# Altium PCB IRF7317+TC4427.PcbDoc
Units mil, origin at the board's own origin, x right, y up, seen from the top; angles counter-clockwise.
Board outline 2700 x 1560 mil, 2 copper layers (Top Layer, Bottom Layer); 37 components, 20 nets, 108 pads, 27 vias.
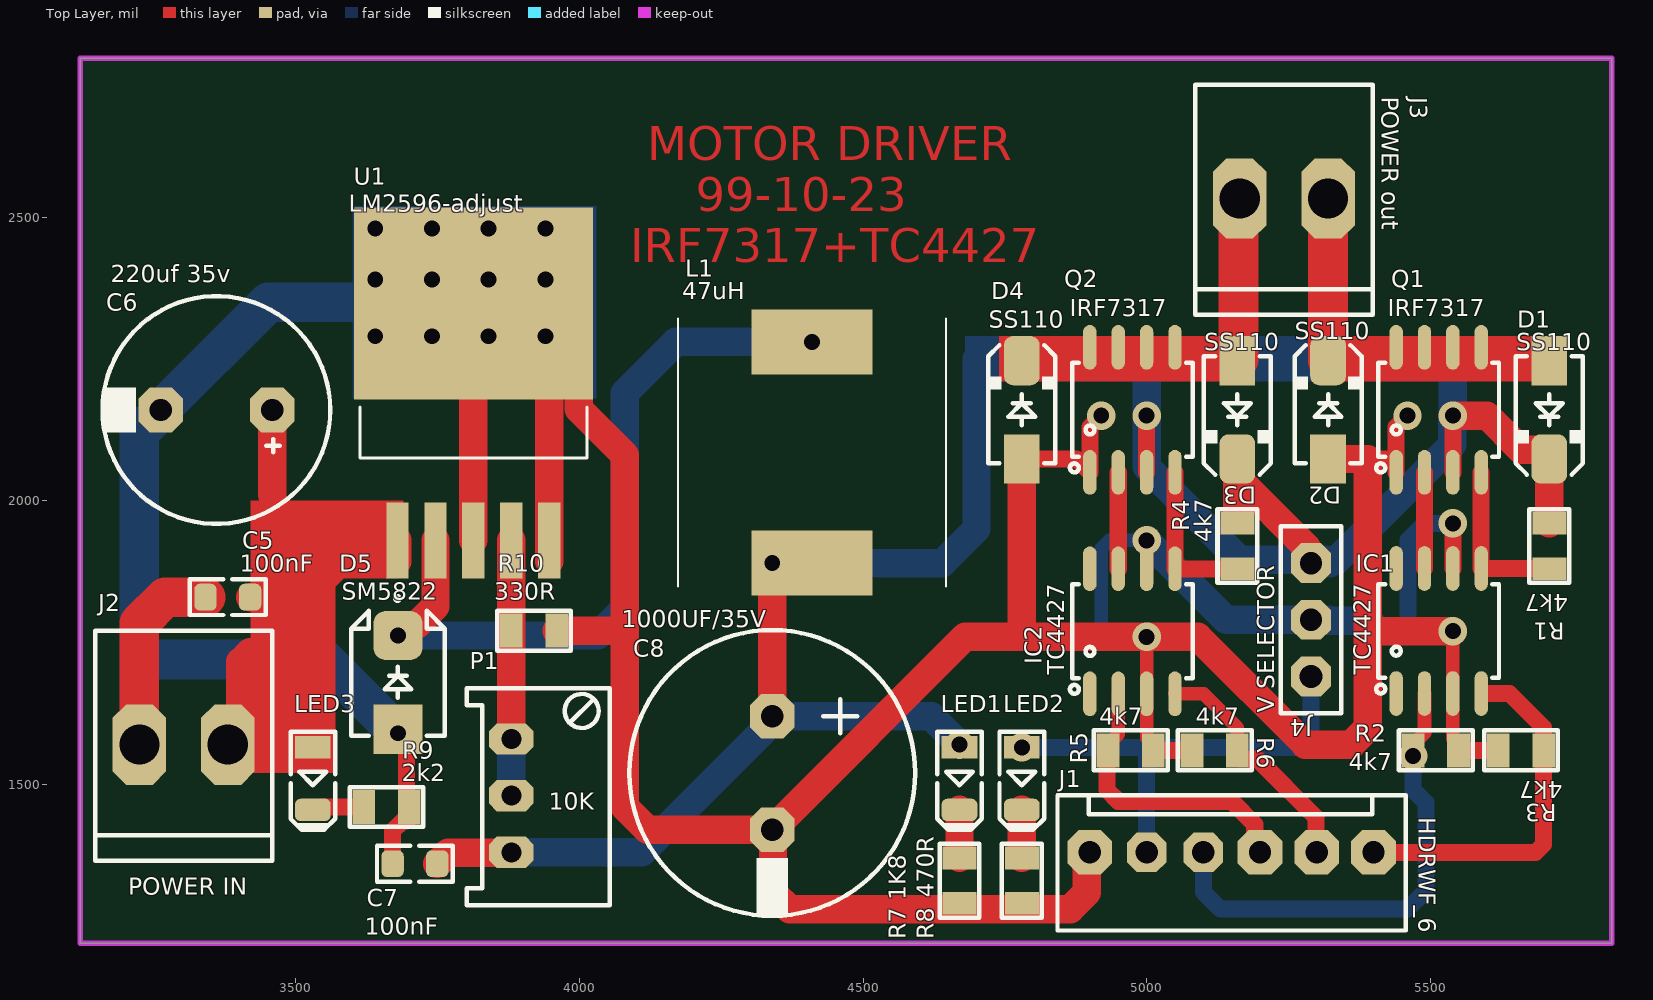
[diagram p0: Top Layer view]
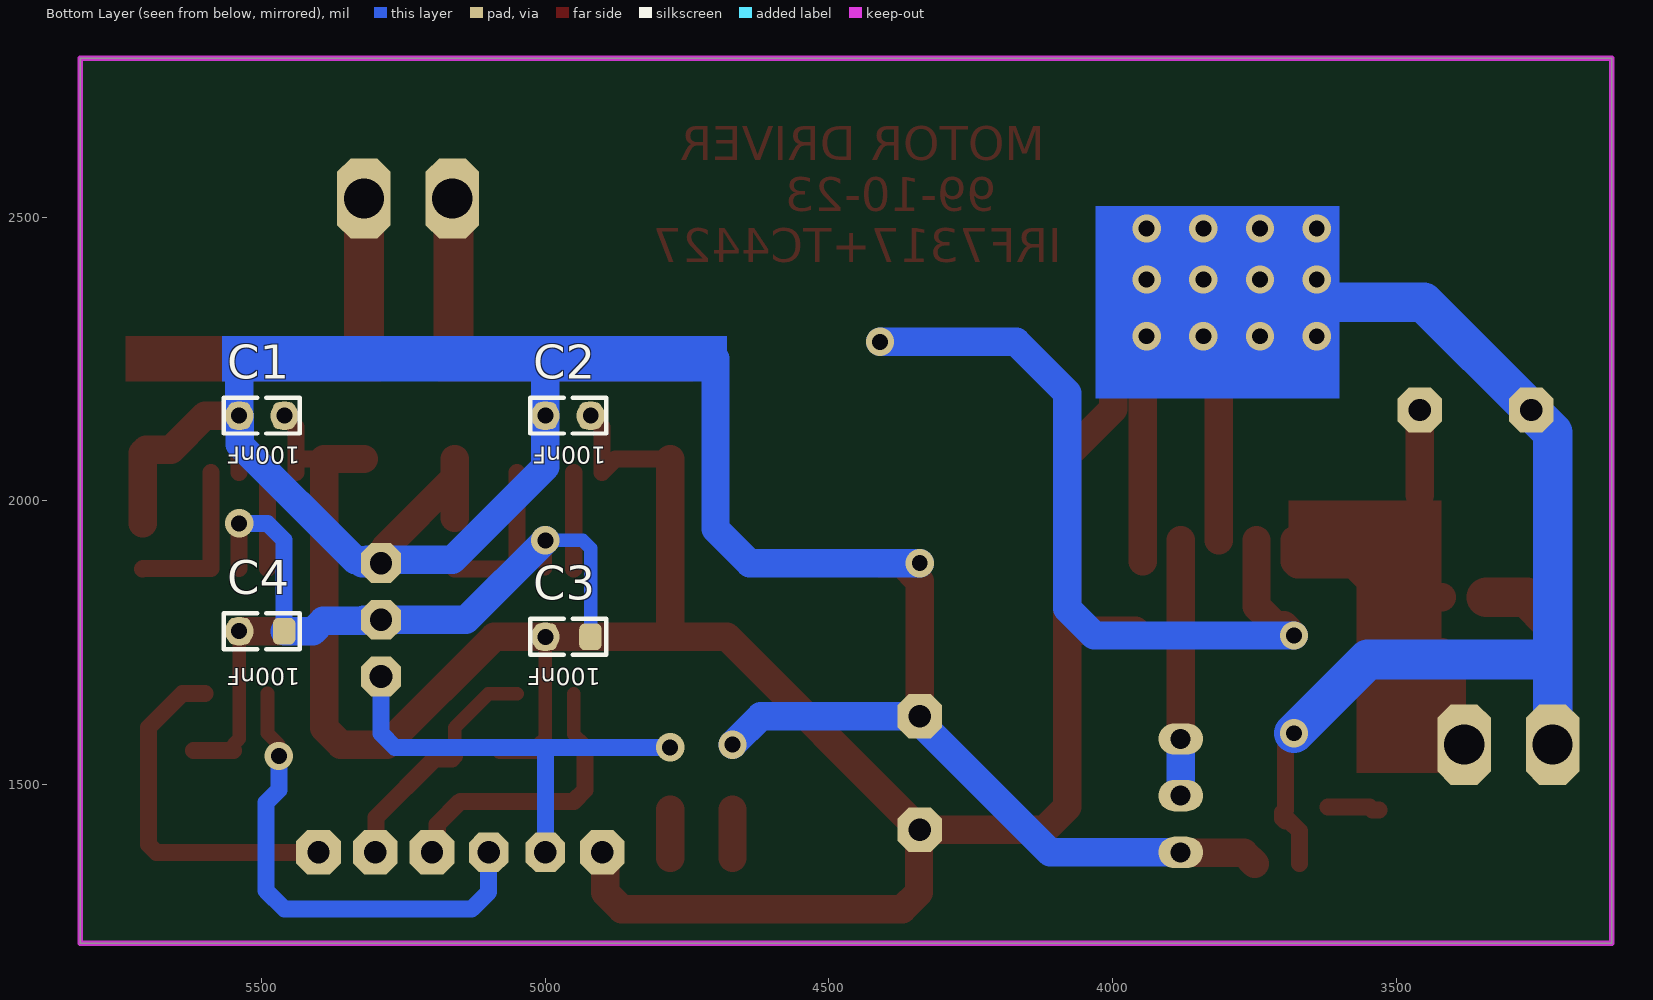
[diagram p1: Bottom Layer view, seen from below]
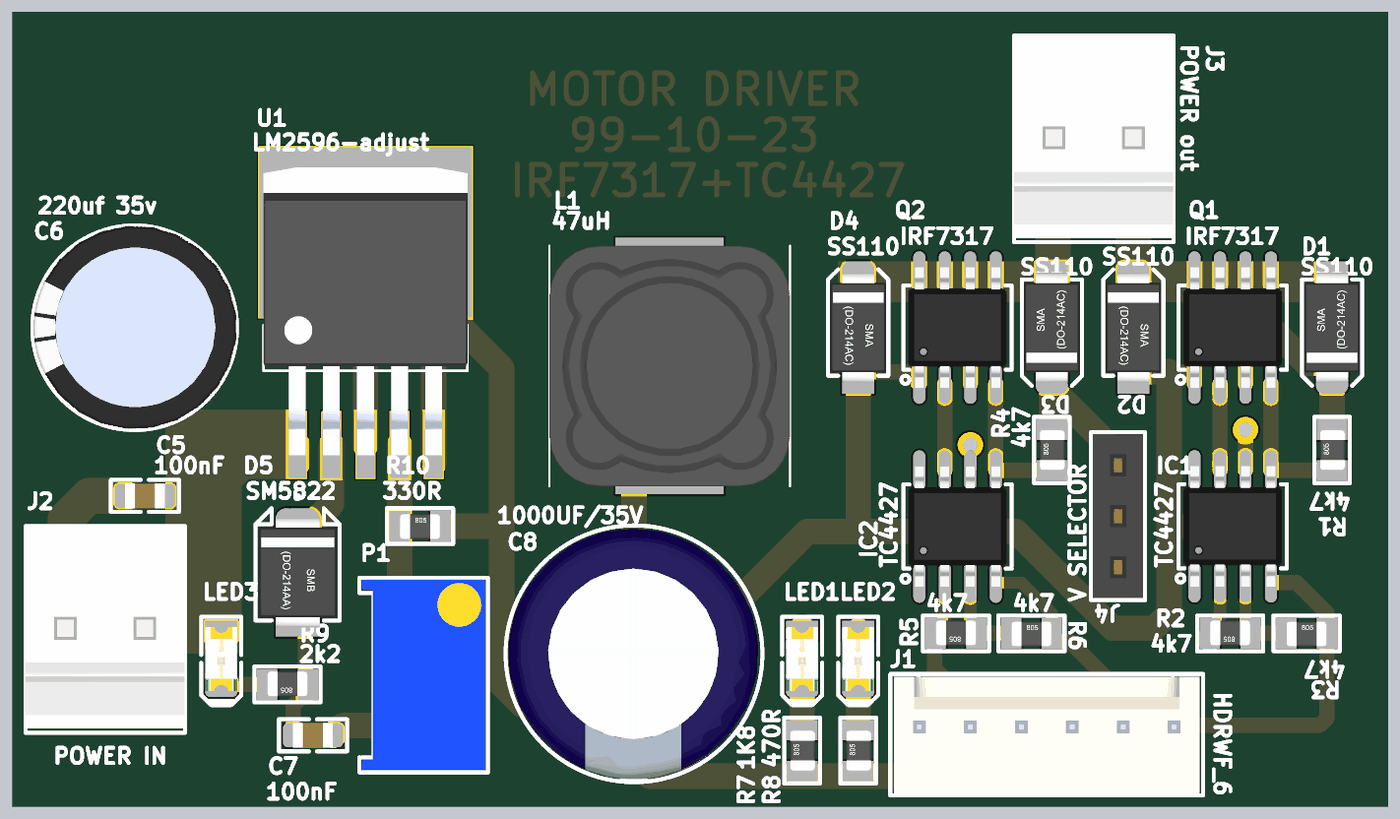
[diagram p2: 3D render of the assembled board from above, using the file's embedded part models]
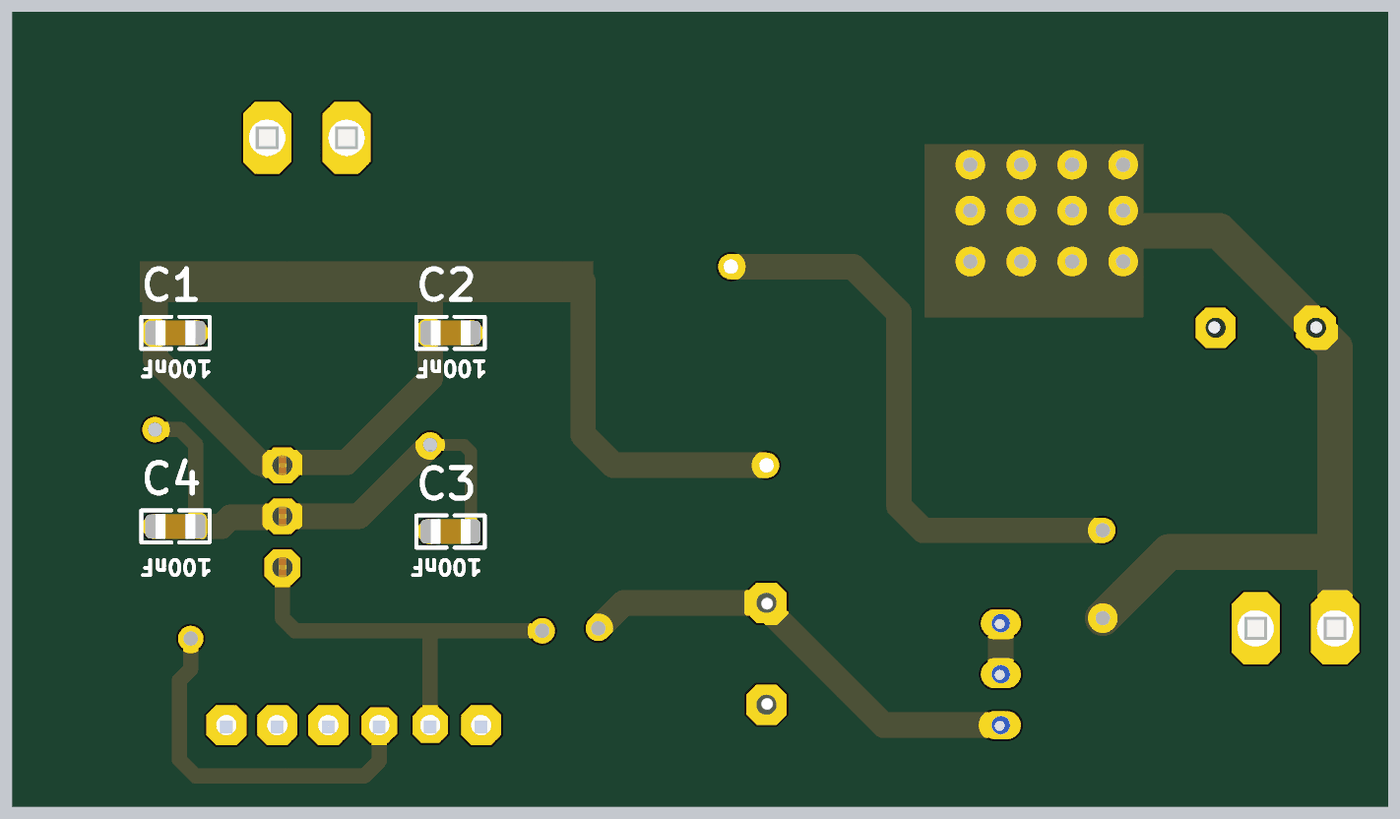
[diagram p3: 3D render of the assembled board from below, using the file's embedded part models]

## Layer stack, top to bottom
Top Solder: solder mask 0.4, Solder Resist, Dk 3.5
Top Layer: signal copper 1.4
Dielectric 1: dielectric 12.6, FR-4, Dk 4.8
Bottom Layer: signal copper 1.4
Bottom Solder: solder mask 0.4, Solder Resist, Dk 3.5

## Board outline
3120,1220 3120,2780 5820,2780 5820,1220

## Design rules (kind name [scope] priority, off if disabled: settings)
Clearance [All] p1: gap=10 ignorepadtopadclearanceinfootprint=FALSE except(0: Arc-Hole Track-Hole SMDPad-Hole THPad-Hole Via-Hole Fill-Hole Poly-Hole Region-Hole Text-Hole)
PolygonConnect [All] p1: connectstyle=Relief reliefconductorwidth=10 reliefentries=4 polygonreliefangle="90 Angle" airgapwidth=10
RoutingVias [All] p1: holewidth=28 width=50 viastyle="Through Hole" minholewidth=28 minwidth=50 maxholewidth=28 maxwidth=50
SolderMaskExpansion [All] p1: expansion=4 istentingtop=FALSE
Width [All] p1: maxlimit=70 minlimit=20 preferedwidth=30 minimp=50.000000 maximp=50.000000 favimp=50.000000
30 further rules are at their usual default settings.

## Components (designator, comment, footprint, x,y, rotation, side; value= is the part's Value field where it differs from the comment)
C1 "100nF" C0805 5500,2150 r0 bottom
C2 "100nF" C0805 4960,2150 r0 bottom
C3 "100nF" C0805 4960,1760 r180 bottom
C4 "100nF" C0805 5500,1770 r180 bottom
C5 "100nF" C0805 3380,1830 r0 top
C6 "220uf 35v" C_EL_10X12 3360,2160 r180 top
C7 "100nF" C0805 3710,1360 r0 top
C8 "1000UF/35V" C_EL_12X25 4340,1520 r270 top
D1 "SS110" D_SMA 5710,2160.24 r270 top value=?
D2 "SS110" D_SMA 5320,2160.24 r90 top value=?
D3 "SS110" D_SMA 5160,2160.24 r270 top value=?
D4 "SS110" D_SMA 4780,2160.24 r90 top value=?
D5 "SM5822" D_SMB 3680,1679.77 r90 top value=?
IC1 "TC4427" SO_8 5515,1770.24 r90 top
IC2 "TC4427" SO_8 4975,1769.76 r90 top
J1 "HDRWF_6" WF_6 5150,1380 r180 top
J2 "POWER IN" PWL_2 3302.05,1570 r180 top
J3 "POWER out" PWL_2 5242.05,2532.79 r180 top
J4 "V SELECTOR" 3_SIP 5290,1790 r90 top
L1 "47uH" CDRH127LDNP560MC-12*12 4410,2279.76 r180 top
LED1 "" LED1206RED 4670,1510 r270 top
LED2 "" LED1206RED 4780,1510 r270 top
LED3 "" LED1206RED 3530,1510 r270 top
P1 "10K" POT_3296W 3880,1480 r270 top
Q1 "IRF7317" SO_8 5515,2160.24 r90 top
Q2 "IRF7317" SO_8 4975,2160.24 r90 top
R1 "4k7" R0805 5710,1920 r0 top
R2 "4k7" R0805 5510,1560 r90 top
R3 "4k7" R0805 5660,1560 r270 top
R4 "4k7" R0805 5160,1920 r0 top
R5 "4k7" R0805 4971.99,1560 r90 top
R6 "4k7" R0805 5120,1560 r270 top
R7 "1K8" R0805 4670,1330 r0 top
R8 "470R" R0805 4780,1330 r0 top
R9 "2k2" R0805 3660,1460 r90 top
R10 "330R" R0805 3920,1770.75 r270 top
U1 "LM2596-adjust" "to-263-5 5d2pak LM2596S" 3813.07,2347.32 r90 top

## Footprints (in the part's own frame and the unit in brackets; to place one, negate y for a bottom-side part, rotate by r counter-clockwise, add the part's x,y. Pads: shape width x height; smd on the part's side, far side on the other; paste and mask are expansions set on the pad)
3_SIP [mil] "Socket Header, Pitch 2.54 mm, THT, Vertical, single row, 3p"
  oct 70x70 hole 40.16: 1(-100,0)
  oct 70x70 hole 39.37: 2(0,0) 3(100,0)
  silkscreen extent -165,-53 165,53, body extent -160,-49 160,49, height 337
C0805 [mm] "CHIP Capacitor, 2.0X1.3mm, 0805"
  rrect50% 1x1.2 smd mask+0.075: 1(-1,0) 2(1,0)
  Top Layer pour cut-out: -0.5,0.8 0.5,0.8 0.5,-0.8 -0.5,-0.8
  silkscreen extent -1.7,-0.8 1.7,0.8, body extent -1,-0.63 1,0.62, height 1
C_EL_10X12 [mm] "Cap Elec, D10.0X12.0H pitch: 5.0mm"
  oct 2x2 hole 1: 1(-2.5,0) 2(2.5,0)
  silkscreen extent -5.1,-5.1 5.1,5.1, body extent -5.07,-5.08 5.05,5.04, height 13.7
C_EL_12X25 [mm] "Cap Elec, D12.0X25.0H pitch: 5.0mm, RB.2/.5"
  oct 2x2 hole 1: 1(-2.54,0) 2(2.54,0)
  silkscreen extent -6.4,-6.4 6.4,6.4, body extent -6.25,-6.27 6.25,6.21, height 25.8
CDRH127LDNP560MC-12*12 [mm]
  rect 5.4x2.9 smd: 1(0,0) 2(0,9.9)
  silkscreen extent -6,-1.05 6,10.95, body extent -6,-1.05 6,10.95, height 7.8
D_SMA [mm] "SMA Molded Diode, 2-Leads, Body 4.3x2.7mm, SOD-128"
  rect 2.2x1.6 smd: 1(-2.2,0)
  rrect50% 2.2x1.6 smd: 2(2.2,0)
  silkscreen extent -2.4,-1.5 2.9,1.5, body extent -2.75,-1.4 2.75,1.4, height 2.6
D_SMB [mm] "SMB Molded Diode, 2-Leads, Body 4.3x3.5mm"
  rect 2.2x2.2 smd: 1(-2.1,0)
  rrect50% 2.2x2.2 smd: 2(2.1,0)
  Top Layer pour cut-out: -1.524,2.1 -1.524,-2.1 1.524,-2.1 1.524,2.1
  silkscreen extent -2.4,-2.1 3.2,2.1, body extent -2.75,-1.95 2.75,1.95, height 2.45
LED1206RED [mm] "LED, 1206, RED"
  rect 1x1.6 smd mask+0.075: 1(-1.4,0)
  rrect50% 1x1.6 smd mask+0.075: 2(1.4,0)
  Top Layer pour cut-out: -1.1,1.1 -1.1,-1.1 1.1,-1.1 1.1,1.1
  silkscreen extent -2.1,-1 2.3,1, body extent -1.6,-0.8 1.6,0.8, height 0.68
POT_3296W [mm] "POT, TRIM, 10.0X5.0mm, pitch: 2.5mm 3299W 3296W S64W"
  oct 1.4x2 / inner round 1.2 / far side oval 1.4x2 hole 0.9: 1(-2.54,0) 2(0,0) 3(2.54,0)
  silkscreen extent -4.8,-2 4.9,4.4, body extent -4.73,-1.85 4.8,4.25, height 11.56
PWL_2 [mm] "Connector; Header; 2 Position"
  oct 2.4x3.6 hole 1.8: 1(-1.98,0) 2(1.98,0)
  silkscreen extent -3.98,-5.1 3.96,5.21, body extent -3.96,-5 3.96,5, height 13.5
R0805 [mil]
  rect 60x40 smd: 1(0,40) 2(0,-40)
  silkscreen extent -35,-65 35,65, body extent -24,-39 26,39, height 31
SO_8 [mm] "SOP-8, 5x3.9mm body 1.27mm pitch, SOT96-1, M08A, S8, SOIC8, VO8, MS-012AA(JEDEC), R-8, 8S2, VOG8"
  oval 2x0.6 smd: 1(-2.8,1.905) 2(-2.8,0.635) 3(-2.8,-0.635) 4(-2.8,-1.905) 5(2.8,-1.905) 6(2.8,-0.635) 7(2.8,0.635) 8(2.8,1.905)
  silkscreen extent -2.8,-2.7 2.1,2.8, body extent -3,-2.45 3,2.45, height 1.7
"to-263-5 5d2pak LM2596S" [mm]
  rect 3.4x1 smd paste-3 mask+0: 1(-10.6,3.4) 2(-10.6,1.7) 3(-10.6,0) 4(-10.6,-1.7) 5(-10.6,-3.4)
  rect 8.6x10.7 smd paste-6 mask+0: 6(0,0)
  silkscreen extent -13.3,-5.08 -4.62,5.08, body extent -11.11,-5.08 3.24,5.08, height 4.65
WF_6 [mm] "DS1070  WF, Cvilux CI31 pitch 2.54mm"
  oct 2x2 hole 1: 1(-6.35,0) 2(-3.81,0) 3(-1.27,0) 6(6.35,0)
  oct 1.778x1.778 hole 1: 4(1.27,0) 5(3.81,0)
  silkscreen extent -7.8,-2.55 7.8,3.5, body extent -7.62,-2.4 7.62,3.4, height 11.56

## Part data
C1 C2 C3 C4 C5 C7: library part C
C6: library part CAP3528
C8: library part CAP_ELECTRO_POLIMER
D1 D2 D3 D4 D5: library part SCHOTTKY, "DIODE, SCHOTTKY, 40V, 1A", ASSEMBLY=ASSEMBLY, DESC=DESCRIPTION, MANF=DIODES, MANF_P#=1N5819HW-7-F, PARAM=40V, PARAM2=1A, Price=PRICE
IC1 IC2: library part TC4427EOA713, "Integrated Circuit", Manufacturer_Name=Microchip, Mouser Part Number=579-TC4427EOA713, Arrow Part Number=TC4427EOA713, Arrow Price/Stock=https://www.arrow.com/en/products/tc4427eoa713/microchip-technology, Datasheet Link=http://www.microchip.com/mymicrochip/filehandler.aspx?ddocname=en011741, Height=1.75mm, Manufacturer_Part_Number=TC4427EOA713, Mouser Price/Stock=https://www.mouser.co.uk/ProductDetail/Microchip-Technology/TC4427EOA713?qs=iwvYsH9bSFbKmD8r5x5IJg%3D%3D
J1: "Header, WF, Pitch: 2.54mm"
J2 J3: library part "sip 2", "WR-PHD Pin Header, THT, pitch 2.54mm, Single Row, Vertical, 2pin", Contact Resistance=20mOhm, Operating Temperature="-40 to +105degC", Part Number=61300211121, Rated Current=3A, Withstanding Voltage=500VAC, Working Voltage=250VAC, ComponentLink1Description=Manufacturer, ComponentLink1URL=http://www.we-online.de, ComponentLink2Description=Datasheet, ComponentLink2URL=https://katalog.we-online.de/em/datasheet/6130xx11121.pdf, Gender=Male, Mounting Technology=THT, Orientation=Vertical, Packaging=Bag, Pin Number=2, Pitch=2.54mm, Published Date="June 2019", Publisher="Wurth Elektronik", Row Number=Single
J4: library part "sip 3", "WR-PHD Pin Header, THT, pitch 2.54mm, Single Row, Vertical, 3pin", Contact Resistance=20mOhm, Operating Temperature="-40 to +105degC", Part Number=61300311121, Rated Current=3A, Withstanding Voltage=500VAC, Working Voltage=250VAC, ComponentLink1Description=Manufacturer, ComponentLink1URL=http://www.we-online.de, ComponentLink2Description=Datasheet, ComponentLink2URL=https://katalog.we-online.de/em/datasheet/6130xx11121.pdf, Gender=Male, Mounting Technology=THT, Orientation=Vertical, Packaging=Bag, Pin Number=3, Pitch=2.54mm, Published Date="June 2019", Publisher="Wurth Elektronik", Row Number=Single
L1: library part CDRH127_LDNP-560MC, "Inductor", Arrow Part Number=CDRH127/LDNP-560MC, Manufacturer_Name=Sumida, Mouser Part Number=851-CDRH127LDNP560MC, Arrow Price/Stock=https://www.arrow.com/en/products/cdrh127ldnp-560mc/sumida, Datasheet Link=https://www.arrow.com/en/products/cdrh127ldnp-560mc/sumida, Height=8mm, Manufacturer_Part_Number=CDRH127/LDNP-560MC, Mouser Price/Stock=https://www.mouser.co.uk/ProductDetail/Sumida/CDRH127-LDNP-560MC?qs=IXCoV6m%252B579ap3iATSRauQ%3D%3D
LED1 LED2 LED3: library part LED3mm
P1: library part Multi-Turn, "Potentiometer"
Q1 Q2: library part IRF7317PBF, "Transistor", Manufacturer_Name=Infineon, Mouser Part Number=942-IRF7317PBF, Arrow Part Number=IRF7317PBF, Arrow Price/Stock=https://www.arrow.com/en/products/irf7317pbf/infineon-technologies-ag, Datasheet Link=http://www.infineon.com/dgdl/irf7317pbf.pdf?fileId=5546d462533600a4015355f5b8de1b3d, Height=1.75mm, Manufacturer_Part_Number=IRF7317PBF, Mouser Price/Stock=https://www.mouser.com/Search/Refine.aspx?Keyword=942-IRF7317PBF
R1 R2 R3 R4 R5 R6 R7 R8 R9: library part R
R10: library part Res1, "Resistor", LatestRevisionDate=17-Jul-2002, LatestRevisionNote="Re-released for DXP Platform.", PackageDescription="Axial Device, Thru-Hole; 2 Leads; 0.3 in Pin Spacing", PackageReference=AXIAL-0.3, Published=8-Jun-2000, Publisher="Altium Limited"
U1: library part LM2596s

## Via types
v1: diameter 50, hole 28, Top Layer to Bottom Layer, 27 vias

## Nets (pads, with @x,y where several pads share a name; then routed paths per layer and width w, separated by ;. In a path a pad name is that pad's centre, name@x,y a point inside that pad or via, vN(x,y) a via of type N, cw(c..) or ccw(c..) an arc to the next point about the centre after c; other vN are vias at no path point)
24V: C5.2 C6.1 J2.1 LED3.1 U1.1 | length 803.4
  Top Layer w50: 3419.37,1732.99 3402.24,1715.87 3402.24,1592.24 J2.1 3382.44,1567.56 3527.56,1567.56 LED3.1 ; C5.2 3515.83,1830 3573.9,1888.07 3673.9,1888.07 3679.21,1893.39 U1.1 ; 3458.43,2010.64 C6.1
GND: C1.1 C2.1 C3.1 C4.1 C5.1 C6.2 C7.1 C8.2 D2.1 D4.1 D5.1 IC1.3 IC2.3 J1.6 J2.2 Q1.1 Q2.1 R2.2 R3.2 R5.2 R6.2 R7.2 R8.2 R9.2 R10.1 U1.3 U1.5 U1.6 | length 8719.4
  Top Layer w24: v1(5000,1760) IC2.3 5000,1581.99 5011.99,1570 R5.2 ; v1(5540,1770) IC1.3 5540,1580 5550,1570 R2.2
  Top Layer w30: C7.1 3670.63,1417.43 3688.2,1435 3695,1435 3700,1440 3700,1450 3695,1455 3695,1575 v1(3680,1590) ; D4.1 4876.38,2073.62 Q2.1 4900,2130 v1(4920,2150) ; R5.2 R6.2 ; 5390,2073.62 Q1.1@5440,2073.62 ; Q1.1 Q1.1@5440,2073.62 ; v1(5460,2150) 5440,2130 Q1.1@5440,2073.62 ; R2.2 R3.2
  Top Layer w50: U1.3 U1.6 ; U1.5@3946.93,1893.39 U1.5 3946.93,2213.46 U1.6 ; R10.1 4079.44,1770.75 4080,1770.2 ; D4.1 4780,1770 4790,1760 ; J1.6@4900,1387.78 J1.6 4894.5,1374.5 4894.5,1309.29 4865.21,1280 4370.66,1280 4341.37,1309.29 4341.37,1418.63 C8.2 ; D2.1 5390,2073.62 5390,1770 ; v1(5540,1770) 5390,1770 ; U1.6 3854.41,2347.32 3998.7,2203.03 3998.7,2161.69 4080,2080.39 4080,1770.2 ; 4080,1770.2 4080,1460 4120,1420 C8.2 ; C8.2 4680,1760 4790,1760 ; 4790,1760 v1(5000,1760) 5090,1760 5280,1570 5360.71,1570 5390,1599.29 5390,1770
  Top Layer w70: J2.2 3224.09,1784.09 3270,1830 C5.1
  Bottom Layer w24: C4.1 v1(5540,1770)
  Bottom Layer w70: J2.2 3224.09,1720 ; v1(3680,1590) 3550,1720 3224.09,1720 ; 3820,2350 3740,2350 3451.57,2350 C6.2 3261.57,2157.63 3224.09,2120.15 3224.09,1720
  other v1: 3640,2290 3740,2290 3840,2290 3940,2290 3640,2390 3740,2390 3840,2390 3940,2390 3640,2480 3740,2480 3840,2480 3940,2480
Motor-A: D1.1 D2.2 J3.1 Q1.5 Q1.6 Q1.7 Q1.8 | length 285.9
  Top Layer w70: D2.2 J3.1
Motor-B: D3.1 D4.2 J3.2 Q2.5 Q2.6 Q2.7 Q2.8 | length 287.6
  Top Layer w70: D3.1 5162.05,2248.9 5162.05,2530.74 J3.2
Motor-Direct1: IC1.4 J1.1 R3.1 | length 636.6
  Top Layer w30: J1.1 5685.94,1380 5700,1394.06 R3.1 5700,1600 5640,1660 IC1.4@5600,1660
Motor-Direct2: IC2.4 J1.2 R6.1 | length 430.2
  Top Layer w24: IC2.4 5100.47,1659.53 5160,1600 R6.1
  Top Layer w30: R6.1 5160,1550 5165,1545 5195,1545 5298.65,1441.35 5298.65,1381.35 J1.2
NetD5_2: D5.2 L1.1 U1.2 | length 1370.6
  Top Layer w50: v1(3680,1762.45) 3698.31,1780.75 3713.04,1780.75 3746.14,1813.86 U1.2
  Bottom Layer w50: v1(3680,1762.45) 4032.45,1762.45 4080,1810 4080,2190 4170,2280 v1(4410,2280)
NetIC1_5: IC1.5 Q1.4 R1.2 | length 289.7
  Top Layer w30: Q1.4 IC1.5 5590.24,1880.24 5709.76,1880.24 R1.2
NetIC1_7: IC1.7 Q1.2 | length 169.5
  Top Layer w30: IC1.7 Q1.2
NetIC2_5: IC2.5 Q2.4 R4.2 | length 280
  Top Layer w30: Q2.4 IC2.5 R4.2
NetIC2_7: IC2.7 Q2.2 | length 170
  Top Layer w30: IC2.7 Q2.2
NetLED1_2: LED1.2 R7.1 | length 84.9
  Top Layer w50: R7.1 LED1.2
NetLED2_2: LED2.2 R8.1 | length 84.9
  Top Layer w50: R8.1 LED2.2
NetLED3_2: LED3.2 R9.1 | length 92.1
  Top Layer w30: LED3.2 3541.81,1454.88 3546.93,1460 R9.1
NetP1_1: P1.1 P1.2 R10.2 U1.4 | length 450
  Top Layer w50: P1.1 R10.2 U1.4
  Bottom Layer w50: P1.2 P1.1
PWMA: IC1.2 J1.4 R2.1 | length 833.4
  Top Layer w24: R2.1@5470,1570 5490,1590 IC1.2
  Bottom Layer w30: J1.4 5100,1310 5130,1280 5460,1280 5492.43,1312.43 5492.43,1467.57 5470,1490 v1(5470,1550)
PWMB: IC2.2 J1.3 R5.1 | length 516.8
  Top Layer w24: R5.1 4931.99,1570 4950,1588.01 IC2.2
  Top Layer w30: R5.1 4930,1558.01 4930,1490 4950,1470 5150,1470 5190.67,1429.33 5190.67,1389.33 J1.3
Vadj: C1.2 C2.2 C7.2 C8.1 D1.2 D3.2 J4.3 L1.2 LED1.1 P1.3 Q1.3 Q2.3 R1.1 R4.1 | length 3954.5
  Top Layer w30: Q2.3 v1(5000,2150) ; Q1.3 v1(5540,2150)
  Top Layer w50: C7.2 3768.39,1379.02 3879.02,1379.02 P1.3 ; C8.1 4340,1857.91 4372.09,1890 L1.2 ; R4.1@5160,1970 D3.2@5160,2043.5 ; D3.2 5160,2040 5282.86,1917.14 5282.86,1897.14 J4.3 ; v1(5540,2150) 5600,2150 5660,2090 5703.5,2090 5710,2083.5 D1.2 R1.1
  Bottom Layer w50: P1.3 4110,1380 C8.1@4350,1620 ; C8.1 C8.1@4350,1620 ; v1(4340,1890) 4640,1890 4700,1950 4700,2250 ; v1(4670,1570) 4620,1620 C8.1@4350,1620 ; 5000,2260 v1(5000,2150) 5000,2060 5164.29,1895.71 5290,1895.71 5314.29,1895.71 5320,1890 5322.66,1890 5327.58,1894.92 5334.92,1894.92 5539.09,2099.09 5539.09,2149.09 v1(5540,2150) 5540,2260
VCC: J1.5 J4.1 LED2.1 | length 817.5
  Bottom Layer w30: v1(4780,1565.12) 4990,1565.12 ; J1.5 5000,1555.12 4990,1565.12 ; J4.1@5290,1697.95 5290,1590 5265.12,1565.12 4990,1565.12
VDD: C3.2 C4.2 IC1.6 IC2.6 J4.2 | length 1150.6
  Top Layer w24: IC2.6 v1(5000,1930)
  Top Layer w30: IC1.6 v1(5540,1960)
  Bottom Layer w24: C3.2 4920,1760.63 4920,1915.94 4934.06,1930 v1(5000,1930)
  Bottom Layer w30: C4.2@5460,1770 C4.2 5460.63,1930.63 5490,1960 v1(5540,1960)
  Bottom Layer w50: v1(5000,1930) 5140,1790 J4.2 5320,1790 5321.88,1788.12 5391.88,1788.12 5410,1770 C4.2@5460,1770
pads on no net: IC1.1 IC1.8 IC2.1 IC2.8

## Keep-outs
Keep-Out Layer:
  lines w10: 3120,1220 5810,1220 5820,1220 5820,2780 5810,2780 3120,2780 3120,1220

## Other copper
Top Layer:
  rectangle net 24V: 3560,1890 3690,2000
  rectangle net 24V: 3420,1520 3570,2000
  rectangle net Motor-B: 4740,2210 5190,2290
  rectangle net Motor-A: 5290,2210 5740,2290
  text "MOTOR DRIVER" at 4120,2600.01 h60
  text "99-10-23" at 4205,2510.01 h60
  text "IRF7317+TC4427" at 4090,2420 h60
Bottom Layer:
  rectangle net GND: 3600,2180 4030,2520
  rectangle net Vadj: 4680,2210 5570,2290